# Altium PCB IMU.PcbDoc
Units mil, origin at the board's own origin, x right, y up, seen from the top; angles counter-clockwise.
Board outline 6000 x 4000 mil, 2 copper layers (Top Layer, Bottom Layer); 10 components, 9 nets, 58 pads, 23 vias.
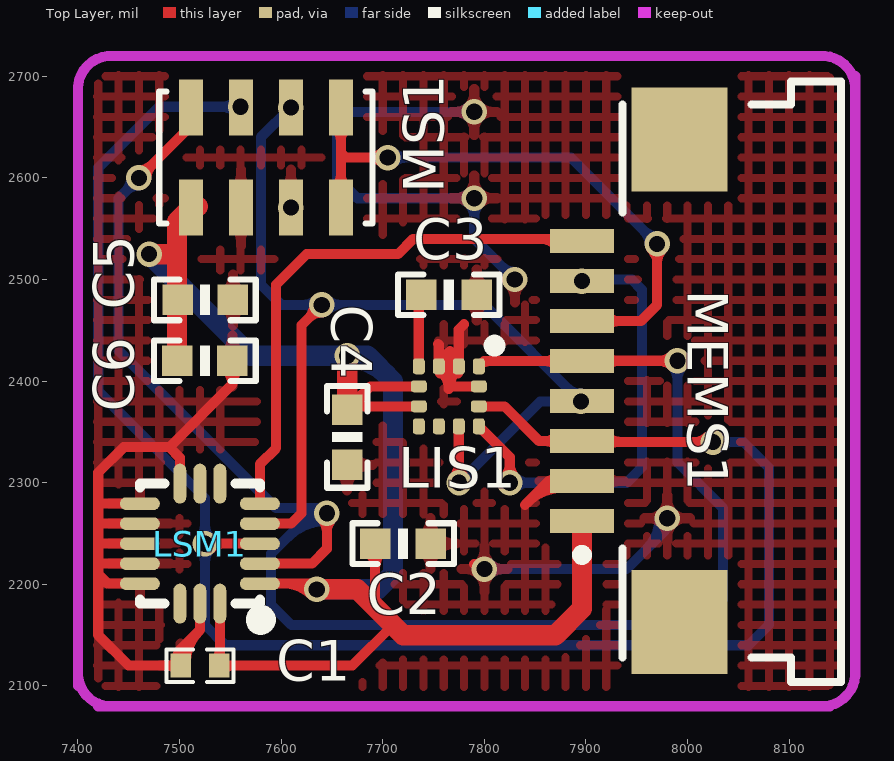
[diagram p0: Top Layer view]
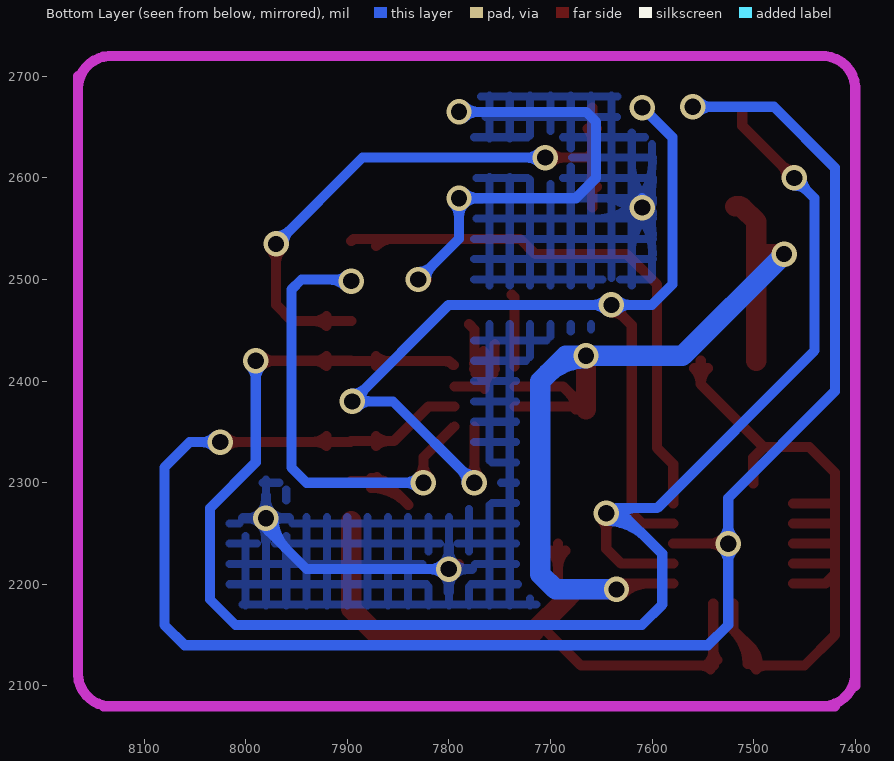
[diagram p1: Bottom Layer view, seen from below]

## Layer stack, top to bottom
Top Layer: signal copper 1.4
Dielectric: dielectric 12.6, FR-4, Dk 4.8
Bottom Layer: signal copper 1.4

## Board outline
1000,1000 7000,1000 7000,5000 1000,5000

## Design rules (kind name [scope] priority, off if disabled: settings)
Clearance Clearance_1 [All vs (InPolygon)] p1: gap=10
Clearance [All] p2: gap=6
PolygonConnect [All] p1: connectstyle=Relief reliefconductorwidth=10 reliefentries=4 polygonreliefangle="90 Angle"
RoutingVias [All] p1: holewidth=28 width=50 viastyle="Through Hole" minholewidth=16 minwidth=25 maxholewidth=28 maxwidth=50
SilkscreenOverComponentPads [All] p1: minsilkscreentomaskgap=10
SolderMaskExpansion [All] p1: expansion=4
Width [All] p1: maxlimit=20 minlimit=10 preferedwidth=10 minimp=50.000000 maximp=50.000000 favimp=50.000000
27 further rules are at their usual default settings.

## Components (designator, comment, footprint, x,y, rotation, side; value= is the part's Value field where it differs from the comment)
C1 "0.1UF" "C 0402" 7520,2120 r0 top
C2 "0.1UF" C0603 7720,2240 r180 top
C3 "100nF" C0603 7765,2485 r0 top
C4 "0.1UF" C0603 7665,2345 r270 top
C5 "4.7uf" C0603 7525,2480 r0 top
C6 "0.1UF" C0603 7525,2420 r180 top
LIS1 "LIS3MDL" LIS3MDL 7765,2385 r270 top
LSM1 "LSM6DS33" LSM6DS33 7520,2240 r180 top
MEMS1 "Header 8" FH12-8S-1.0SH 7960,2400 r90 top
MS1 "MS5611" MS5611 7585,2620 r90 top

## Footprints (in the part's own frame and the unit in brackets; to place one, negate y for a bottom-side part, rotate by r counter-clockwise, add the part's x,y. Pads: shape width x height; smd on the part's side, far side on the other; paste and mask are expansions set on the pad)
C0603 [mil]
  rect 30x30 smd: 1(-27,0) 2(27.5,-0.06)
  silkscreen extent -50,-20 50,20, body extent -31,-16 31,16, height 12
"C 0402" [mil]
  rect 20x23.62 smd: 1(-19,0) 2(19,0)
  silkscreen extent -33,-16 33,16, body extent -20,-10 20,10, height 20
FH12-8S-1.0SH [mm] "Connector; FH12 Series; 8 Position; 1.0mm Spaced Bottom Eccentric Contact"
  rect 2.6x2.4 smd: 0(-6.02,-0.813) 0(6.045,-0.813)
  rect 0.6x1.6 smd: 1(-3.5,1.625) 2(-2.5,1.625) 3(-1.5,1.625) 4(-0.5,1.625) 5(0.5,1.625) 6(1.5,1.625) 7(2.5,1.625) 8(3.5,1.625)
  silkscreen extent -7.52,-4.85 7.49,1.75, body extent -7.49,-4.9 7.51,1.9, height 2.8
LIS3MDL [mm]
  rrect50% 0.4x0.3 smd: 1(-0.75,0.75) 2(-0.75,0.25) 3(-0.75,-0.25) 4(-0.75,-0.75) 7(0.75,-0.75) 8(0.75,-0.25) 9(0.75,0.25) 10(0.75,0.75)
  rrect50% 0.3x0.4 smd: 5(-0.25,-0.75) 6(0.25,-0.75) 11(0.25,0.75) 12(-0.25,0.75)
  silkscreen extent -1.29,1.12 -1.25,1.16
LSM6DS33 [mm]
  oval 1x0.32 smd: 1(-1.5,1) 2(-1.5,0.5) 3(-1.5,0) 4(-1.5,-0.5) 5(-1.5,-1) 9(1.5,-1) 10(1.5,-0.5) 11(1.5,0) 12(1.5,0.5) 13(1.5,1)
  oval 0.32x1 smd: 6(-0.5,-1.5) 7(0,-1.5) 8(0.5,-1.5) 14(0.5,1.5) 15(0,1.5) 16(-0.5,1.5)
  silkscreen extent -1.65,-1.5 1.5,2.03, body extent -1.5,-1.5 1.5,1.5, height 0.75
MS5611 [mm] "QFN, 8-Leads, Body 5.00x3.00mm, Pitch 1.25mm/0.00mm, Thermal Pad 4.35x0.00mm, IPC Medium Density"
  rect 1.4x0.6 smd: 1(-1.25,1.875) 2(-1.25,0.625) 3(-1.25,-0.625) 4(-1.25,-1.875) 5(1.25,-1.875) 6(1.25,-0.625) 7(1.25,0.625) 8(1.25,1.875)
  silkscreen extent -1.65,-2.67 1.65,2.67, body extent -1.6,-2.5 1.6,2.5, height 1

## Part data
C1 C2 C3 C4 C5 C6: library part CAP, "Capacitor"
MEMS1: "Header, 8-Pin"
MS1: "Sensor"

## Via types
v1: diameter 25, hole 16, Top Layer to Bottom Layer, 23 vias

## Nets (pads, with @x,y where several pads share a name; then routed paths per layer and width w, separated by ;. In a path a pad name is that pad's centre, name@x,y a point inside that pad or via, vN(x,y) a via of type N, cw(c..) or ccw(c..) an arc to the next point about the centre after c; other vN are vias at no path point)
3.3: C1.2 C2.2 C4.1 C5.1 C6.2 LIS1.5 LIS1.6 LSM1.1 LSM1.16 MEMS1.1 MS1.1 | length 1917.4
  Top Layer w10: C1.2@7535.46,2125.35 ccw(c7525.28,2135.54) 7539.69,2135.54 ; 7539.69,2132.23 ccw(c7549.42,2132.23) C1.2@7542.54,2125.35 ; LSM1.16 7539.69,2120.68 C1.2 7670,2120 7710,2160 ; C1.2@7542.54,2116.46 cw(c7551.07,2107.93) 7551.07,2120 cw(c7551.07,2132.07) C1.2@7542.54,2123.54 ; LSM1.1 7629.37,2200.63 v1(7635,2195) ; 7603.3,2200.63 cw(c7603.3,2163.3) v1@7629.7,2189.7 ; C4.1 C4.1@7668.16,2375.16 ; C4.1@7665,2382 ccw(c7665,2406.14) 7682.07,2389.07 ccw(c7699.14,2372) C4.1@7675,2372 ; C2.2@7685.43,2232.99 cw(c7668.36,2215.92) 7692.5,2215.92 cw(c7716.64,2215.92) C2.2@7699.57,2232.99 ; 7690,2180 7692.5,2182.5 C2.2 ; LIS1.6 C4.1@7668.16,2375.16 ; LIS1.5 7687.84,2394.84 C4.1@7668.16,2375.16
  Top Layer w20: v1(7470,2525) 7497.5,2525 ; C6.2 7497.5,2525 ; MS1.1@7510.76,2570.37 cw(c7515.56,2565.57) MS1.1@7518.16,2571.83 ; MS1.1 7497.5,2557.11 7497.5,2525 ; v1(7635,2195) 7675,2195 7690,2180 7710,2160 7720,2150 7870,2150 7896.02,2176.02 MEMS1.1 ; C4.1 v1(7665,2425)
  Bottom Layer w20: v1(7470,2525) 7570,2425 v1(7665,2425) 7685,2425 7710,2400 7710,2210 7695,2195 v1(7635,2195) ; v1@7665,2422.5 cw(c7665,2368.18) 7703.41,2406.59 ; v1@7665.69,2422.6 cw(c7673.89,2393.89) 7695,2415
CS1: LSM1.5 MEMS1.8 | length 575.8
  Top Layer w10: LSM1.5 7579.06,2318.11 7595,2334.05 ; 7585,2324.06 7595,2334.06 ; 7854.57,2540 cw(c7854.57,2516.03) MEMS1.8@7871.52,2532.98 ; MEMS1.8 7893.82,2540 7730,2540 7715,2525 7625,2525 7595,2495 7595,2334.06
CS4: LIS1.10 MEMS1.7 | length 530.8
  Top Layer w10: LIS1.10 7825,2325 v1(7825,2300) ; v1@7819.7,2305.3 ccw(c7806.89,2318.11) 7825,2318.11 ccw(c7843.11,2318.11) v1@7830.3,2305.3
  Bottom Layer w10: v1(7825,2300) 7940,2300 7955,2315 7955,2490 7945,2500 7895,2500 7896.02,2498.98 v1(7896.02,2498.42) ; v1@7830.3,2294.7 cw(c7843.11,2281.89) 7843.11,2300 cw(c7843.11,2318.11) v1@7830.3,2305.3 ; v1@7901.33,2493.12 cw(c7917.93,2476.51) 7917.93,2500 ; v1@7901.33,2503.73 ccw(c7910.33,2512.73) 7910.33,2500
CS5: MEMS1.6 MS1.4 MS1.5 | length 778.7
  Top Layer w10: MS1.4@7654,2591.35 ccw(c7642.38,2602.98) 7658.82,2602.98 ccw(c7675.26,2602.98) MS1.4@7663.64,2591.35 ; MS1.5@7654,2648.65 cw(c7642.38,2637.02) 7658.82,2637.02 cw(c7675.26,2637.02) MS1.5@7663.64,2648.65 ; MS1.4 7658.82,2625 ; MS1.5 7658.82,2625 ; v1@7699.7,2614.7 ccw(c7686.89,2601.89) 7686.89,2620 ccw(c7686.89,2638.11) v1@7699.7,2625.3 ; v1(7705,2620) 7663.82,2620 7658.82,2625 ; MEMS1.6 7954.05,2459.05 7970,2475 v1(7970,2535) ; MEMS1.6@7920.52,2454.24 cw(c7932.15,2442.61) 7932.15,2459.05 cw(c7932.15,2475.5) MEMS1.6@7920.52,2463.87 ; v1@7964.7,2529.7 cw(c7951.89,2516.89) 7970,2516.89 cw(c7988.11,2516.89) v1@7975.3,2529.7
  Bottom Layer w10: v1(7705,2620) 7885,2620 v1(7970,2535) ; v1@7710.3,2614.7 cw(c7723.11,2601.89) 7723.11,2620 cw(c7723.11,2638.11) v1@7710.3,2625.3 ; v1@7962.5,2535 ccw(c7944.39,2535) 7957.2,2547.8 ccw(c7970,2560.61) v1@7970,2542.5
GND: C1.1 C2.1 C3.2 C4.2 C5.2 C6.1 LIS1.2 LIS1.3 LIS1.12 LSM1.8 LSM1.9 LSM1.10 LSM1.11 LSM1.12 LSM1.13 LSM1.15 MEMS1.2 MS1.2 MS1.3 | length 2166.8
  Top Layer w10: LSM1.13 7429.37,2200.63 7420,2210 ; LSM1.12 7420.31,2220.32 7420,2220 ; LSM1.11 7420,2240 ; LSM1.10 7420.31,2259.69 7420,2260 ; LSM1.9 7420.63,2279.37 7420,2280 ; C1.1@7496,2121.81 cw(c7518.18,2121.81) 7502.5,2137.5 ; C1.1@7497.46,2116.46 ccw(c7488.93,2107.93) 7488.93,2120 ccw(c7488.93,2132.07) C1.1@7497.46,2123.54 ; C1.1@7497.46,2125.35 ccw(c7488.93,2133.88) 7501,2133.88 ccw(c7513.07,2133.88) C1.1@7504.54,2125.35 ; LSM1.8 7500.31,2324.69 7490,2335 ; C1.1@7506,2121.81 cw(c7552.33,2121.81) 7519.57,2154.57 ; LSM1.15 7520,2155 7501,2136 C1.1 7450,2120 7420,2150 7420,2210 ; C6.1@7545.18,2412.69 cw(c7530.55,2397) 7552,2397 ; C6.1 7552,2397 ; C6.1@7558.82,2412.69 ccw(c7573.45,2397) 7552,2397 ; 7754.47,2436.4 7755.16,2435.72 LIS1.3 ; LIS1.3@7754.65,2411.81 cw(c7741.68,2392.43) 7765,2392.43 cw(c7788.32,2392.43) LIS1.2@7775.35,2411.81 ; LIS1.3@7755.05,2417.4 ccw(c7753.75,2428.57) 7765,2428.57 ; LIS1.3@7756.21,2407.46 ccw(c7755.06,2417.34) 7765,2417.34 ccw(c7774.94,2417.34) LIS1.2@7773.79,2407.46 ; LIS1.3@7760.22,2420.12 cw(c7754.22,2411.16) 7765,2411.16 cw(c7775.78,2411.16) LIS1.2@7769.78,2420.12 ; 7766,2429.57 7765,2428.57 ; LIS1.2 7774.84,2450.78 7780,2455.94 ; LIS1.2@7774.95,2417.4 cw(c7776.25,2428.57) 7765,2428.57 ; v1@7790,2220 7795,2220 v1(7800,2215) ; LIS1.12 7765.16,2394.84 7765,2395 7765,2428.57 ; v1@7821.5,2500 v1(7830,2500) ; 7840,2278.15 7863.42,2301.57 ; 7842.66,2280.81 cw(c7876.34,2247.13) MEMS1.2@7876.34,2294.76 ; 7856.96,2295.12 cw(c7865.18,2286.9) MEMS1.2@7872.22,2296.15 ; 7859.73,2297.88 cw(c7876.34,2281.28) MEMS1.2@7876.34,2304.76 ; MEMS1.2@7870.72,2297.73 ccw(c7863.42,2292.73) 7863.42,2301.57 ; MEMS1.2@7870.72,2305.42 cw(c7863.42,2310.42) 7863.42,2301.57 ; MEMS1.2 7863.42,2301.57 ; 7420,2210 7420,2220 ; 7420,2220 7420,2240 ; 7420,2240 7420,2260 ; 7420,2260 7420,2280 ; 7420,2280 7420,2310 7445,2335 7490,2335 ; 7490,2335 7552,2397
  Bottom Layer w10: v1(7609.61,2570.79) 7610,2571.18 v1@7610,2580 ; v1@7784.7,2585.3 cw(c7771.89,2598.11) 7771.89,2580 cw(c7771.89,2561.89) 7784.7,2574.7 cw(c7771.89,2561.89) 7790,2561.89 cw(c7808.11,2561.89) v1@7795.3,2574.7 ; v1@7784.7,2659.7 ccw(c7771.89,2646.89) 7771.89,2665 ccw(c7771.89,2683.11) v1@7784.7,2670.3 ; v1(7790,2665) 7665,2665 7655,2655 7655,2600 7675,2580 v1(7790,2580) 7790,2550 7790,2540 v1(7830,2500) ; v1(7800,2215) 7940,2215 7975,2250 7975,2265 v1(7980,2265) ; v1@7805.3,2209.7 cw(c7818.11,2196.89) 7818.11,2215 cw(c7818.11,2233.11) v1@7805.3,2220.3 ; v1@7822.5,2500 ccw(c7804.39,2500) 7817.2,2512.8 ccw(c7830,2525.61) v1@7830,2507.5 ; 7960.13,2235.13 ccw(c7930.25,2265) v1@7972.5,2265 ; 7977.2,2252.2 ccw(c7964.39,2265) v1@7982.5,2265
NetC3_1: C3.1 LIS1.4 | length 71.5
  Top Layer w10: LIS1.4 7735.47,2482.47 C3.1
SPI3_CK: LIS1.1 LSM1.2 MEMS1.5 MS1.8 | length 1960
  Top Layer w10: v1(7460,2600) 7511.18,2651.18 MS1.8 ; v1@7460,2607.5 ccw(c7460,2625.61) 7472.8,2612.8 ccw(c7485.61,2600) v1@7467.5,2600 ; LSM1.2 7630.31,2220.32 7645,2235 v1(7645,2270) ; v1@7639.7,2264.7 cw(c7626.89,2251.89) 7645,2251.89 cw(c7663.11,2251.89) v1@7650.3,2264.7 ; LIS1.1@7795.17,2415.86 cw(c7804.41,2406.61) 7804.41,2419.68 ; LIS1.1@7795.75,2415.75 7799.68,2419.68 MEMS1.5 7896.34,2420 v1(7990,2420) ; MEMS1.5@7871.52,2414.87 ccw(c7859.9,2403.24) 7859.9,2419.68 ccw(c7859.9,2436.13) MEMS1.5@7871.52,2424.5 ; MEMS1.5@7920.52,2414.87 cw(c7932.91,2402.48) 7932.91,2420 ; MEMS1.5@7920.52,2424.5 ccw(c7931.39,2435.37) 7931.39,2420 ; v1@7984.7,2414.7 ccw(c7971.89,2401.89) 7971.89,2420 ccw(c7971.89,2438.11) v1@7984.7,2425.3
  Bottom Layer w10: v1@7452.5,2600 cw(c7434.39,2600) 7447.2,2587.2 cw(c7460,2574.39) v1@7460,2592.5 ; v1(7460,2600) 7440,2580 7440,2430 7595,2275 7635,2275 7590,2230 7590,2180 7610,2160 8010,2160 8035,2185 8035,2275 7990,2320 v1(7990,2420) ; 7606.59,2246.59 cw(c7645,2208.18) v1@7645,2262.5 ; 7614.82,2275 cw(c7614.82,2239.82) v1@7639.7,2264.7 ; 7623.66,2263.66 cw(c7645,2242.32) v1@7645,2272.5 ; v1@7984.7,2414.7 cw(c7971.89,2401.89) 7990,2401.89 cw(c8008.11,2401.89) v1@7995.3,2414.7
SPI3_SI: LIS1.11 LSM1.3 MEMS1.3 MS1.7 | length 1971.7
  Top Layer w10: v1(7525,2240) LSM1.3 ; v1@7530.3,2234.7 cw(c7543.11,2221.89) 7543.11,2240 cw(c7543.11,2258.11) v1@7530.3,2245.3 ; LIS1.11 7819.84,2375.16 7854.06,2340.94 MEMS1.3 7896.97,2340 v1(8025,2340) ; MEMS1.3@7871.52,2336.13 ccw(c7859.9,2324.5) 7859.9,2340.94 ccw(c7859.9,2357.39) MEMS1.3@7871.52,2345.76 ; MEMS1.3@7920.52,2336.13 cw(c7929.87,2326.78) 7929.87,2340 ; MEMS1.3@7920.52,2345.76 ccw(c7934.43,2359.67) 7934.43,2340 ; v1@8019.7,2334.7 ccw(c8006.89,2321.89) 8006.89,2340 ccw(c8006.89,2358.11) v1@8019.7,2345.3
  Bottom Layer w10: v1@7519.7,2234.7 cw(c7506.89,2221.89) 7525,2221.89 cw(c7543.11,2221.89) v1@7530.3,2234.7 ; v1@7519.7,2245.3 ccw(c7506.89,2258.11) 7525,2258.11 ccw(c7543.11,2258.11) v1@7530.3,2245.3 ; v1@7554.7,2664.7 ccw(c7541.89,2651.89) 7541.89,2670 ccw(c7541.89,2688.11) v1@7554.7,2675.3 ; v1(7560,2670) 7480,2670 7420,2610 7420,2390 7525,2285 7525,2160 7545,2140 8060,2140 8080,2160 8080,2315 8055,2340 v1(8025,2340) ; v1@8030.3,2334.7 cw(c8043.11,2321.89) 8043.11,2340 cw(c8043.11,2358.11) v1@8030.3,2345.3
SPI3_SO: LIS1.9 LSM1.4 MEMS1.4 MS1.6 | length 1215.9
  Top Layer w10: LSM1.4 7609.69,2259.69 7620,2270 7620,2455 v1(7640,2475) ; v1@7632.5,2475 cw(c7614.39,2475) 7627.2,2462.2 cw(c7640,2449.39) v1@7640,2467.5 ; v1@7769.7,2305.3 ccw(c7757.27,2317.73) 7774.84,2317.73 ; v1@7774.84,2300.16 LIS1.9 ; 7774.84,2318.49 ccw(c7793.49,2318.49) v1@7780.3,2305.3
  Bottom Layer w10: v1(7609.61,2669.21) 7609.61,2669.61 7580,2640 7580,2495 7600,2475 v1(7640,2475) 7800,2475 v1(7895,2380) 7855,2380 v1(7775,2300) ; v1@7634.7,2469.7 ccw(c7621.89,2456.89) 7621.89,2475 ccw(c7621.89,2493.11) v1@7634.7,2480.3 ; v1@7645.3,2469.7 cw(c7658.11,2456.89) 7658.11,2475 cw(c7658.11,2493.11) v1@7645.3,2480.3 ; v1@7775,2307.5 ccw(c7775,2325.61) 7787.8,2312.8 ccw(c7800.61,2300) v1@7782.5,2300 ; v1@7887.5,2380 ccw(c7869.39,2380) 7882.2,2392.8 ccw(c7895,2405.61) v1@7895,2387.5 ; v1@7889.7,2374.7 ccw(c7876.89,2361.89) 7876.89,2380 ccw(c7876.89,2398.11) v1@7889.7,2385.3
pads on no net: LIS1.7 LIS1.8 LSM1.6 LSM1.7 LSM1.14 MEMS1.0

## Polygon pours and split planes (outlines as drawn)
GND on Top Layer "Top Layer-No Net" (hatched 90Degree grid 20 track 8, remove dead copper, pour order 1000): 7358.5,2730 7343.5,2715 7343.5,2025 8223.5,2025 8238.5,2010 8243.5,2015 8243.5,2780
GND on Bottom Layer "Top Layer-No Net" (hatched 90Degree grid 20 track 8, remove dead copper, pour order 1001): 7480,2681 7485,2676 7485,1976 8290,1976 8310,1996 8320,2006 8320,2696 7980,2696 7960,2676 7960,2266 7790,2266 7775,2281 7775,2681

## Keep-outs
Keep-Out Layer:
  lines w10: 7400,2100 7400,2690 cw(c7432.5,2687.5) 7435,2720 8135,2720 cw(c8132.5,2687.5) 8165,2685 ; 7400,2115 ccw(c7432.5,2112.5) 7430,2080 ; 7420,2080 8140,2080 ; 8130,2080 ccw(c8132.5,2112.5) 8165,2110 8165,2700